# EAGLE board button (EAGLE 9.4.2)
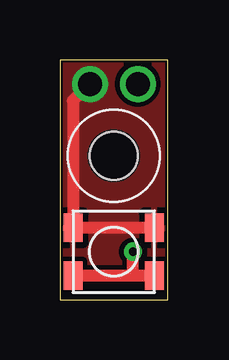
[diagram p0: board, top side]
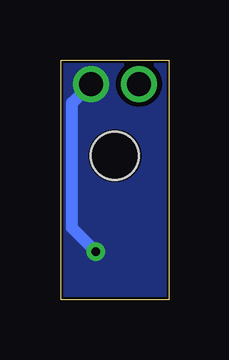
[diagram p1: board, bottom side, seen from below]

Size 4.5 x 10 mm. Coordinates in mm from the lower left corner, seen from the top.
Outline: 0,0 4.5,0 4.5,10 0,10 0,0
Copper layers (1*16): Top 0.035mm / dielectric 1.5mm / Bottom 0.035mm
Design rules "default *": minimum track width 0.00508125mm, minimum drill 0.35mm, track to track 0.2mm, track to pad 0.2mm, pad to pad 0.2mm, via to via 0.2mm, smd to smd 0.2mm, copper to edge 0.1mm, drill to drill 6mil, minimum pad ring 10mil, minimum via ring 8mil, stop-mask expansion 4mil, vias tented up to drill 0mil, thermal gap 10mil
Holes 2 mm at 2.25,6

## Footprints (pad centres in the part's own frame; a part is rotated, then mirrored left to right if it is on the bottom)
BTN-VS-CUT = smd 0.8 x 1.2: P$1 -1.7,1; P$2 1.7,1; P$3 1.7,-1; P$4 -1.7,-1

## Placement (x,y rotation side)
U$1  BTN_VERY_SMALLCUT  [BTN-VS-CUT]  2.25,2 0 top

## Library data of the parts
U$1 = NEON-BLADE-2023

## Nets
P1: U$1.P$1 U$1.P$2
P2: U$1.P$3 U$1.P$4

## Tracks (layer width: path | path; a pad name or v marks a point on that pad's centre or on a via)
P1  (via drill 1)
  Top 0.5: U$1.P$2 U$1.P$1 0.55,8.3 v1.25,9
  pour Top: -0.75,10.5 5.25,10.5 5.25,-0.5 -0.75,-0.5
P2  (via drill 0.35, 1)
  Top 0.5: U$1.P$3 3.05,1 | 3.05,1 U$1.P$4 | 3.05,1 v3.05,2
  Bottom 0.5: v3.05,2 4.05,3 4.05,8.2 v3.25,9
  pour Bottom: -0.75,10.5 5.25,10.5 5.25,-0.5 -0.75,-0.5